# Altium PCB pcb.PcbDoc
Units mm, origin at the board's own origin, x right, y up, seen from the top; angles counter-clockwise.
Board outline 97 x 38.3 mm, 4 copper layers (Top Layer, Layer 1, Layer 2, Bottom Layer), stack 1.283 mm thick; 120 components, 63 nets, 372 pads, 0 vias.
Unrouted connection lines stored in the file: 242.
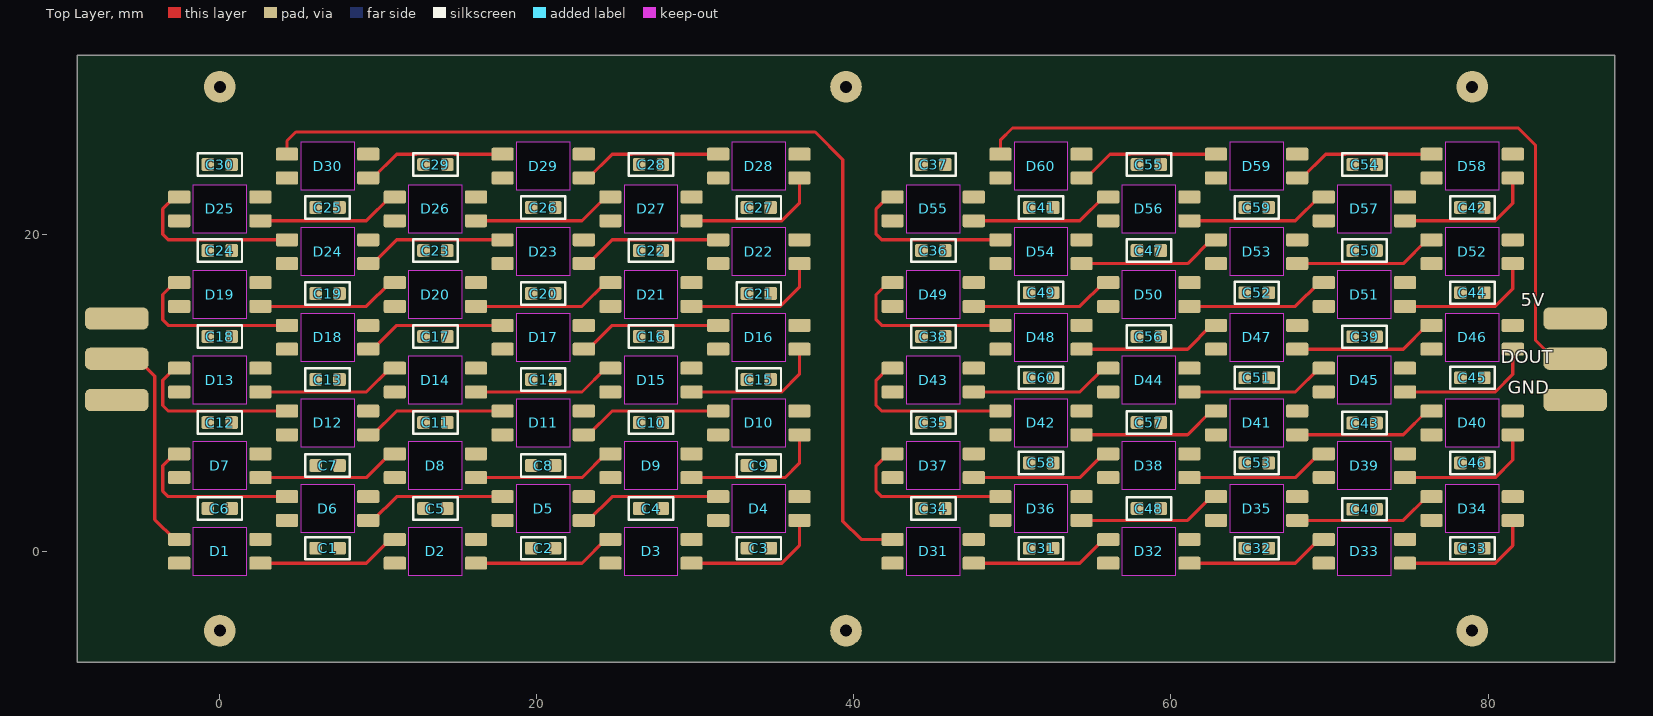
[diagram p0: Top Layer view]
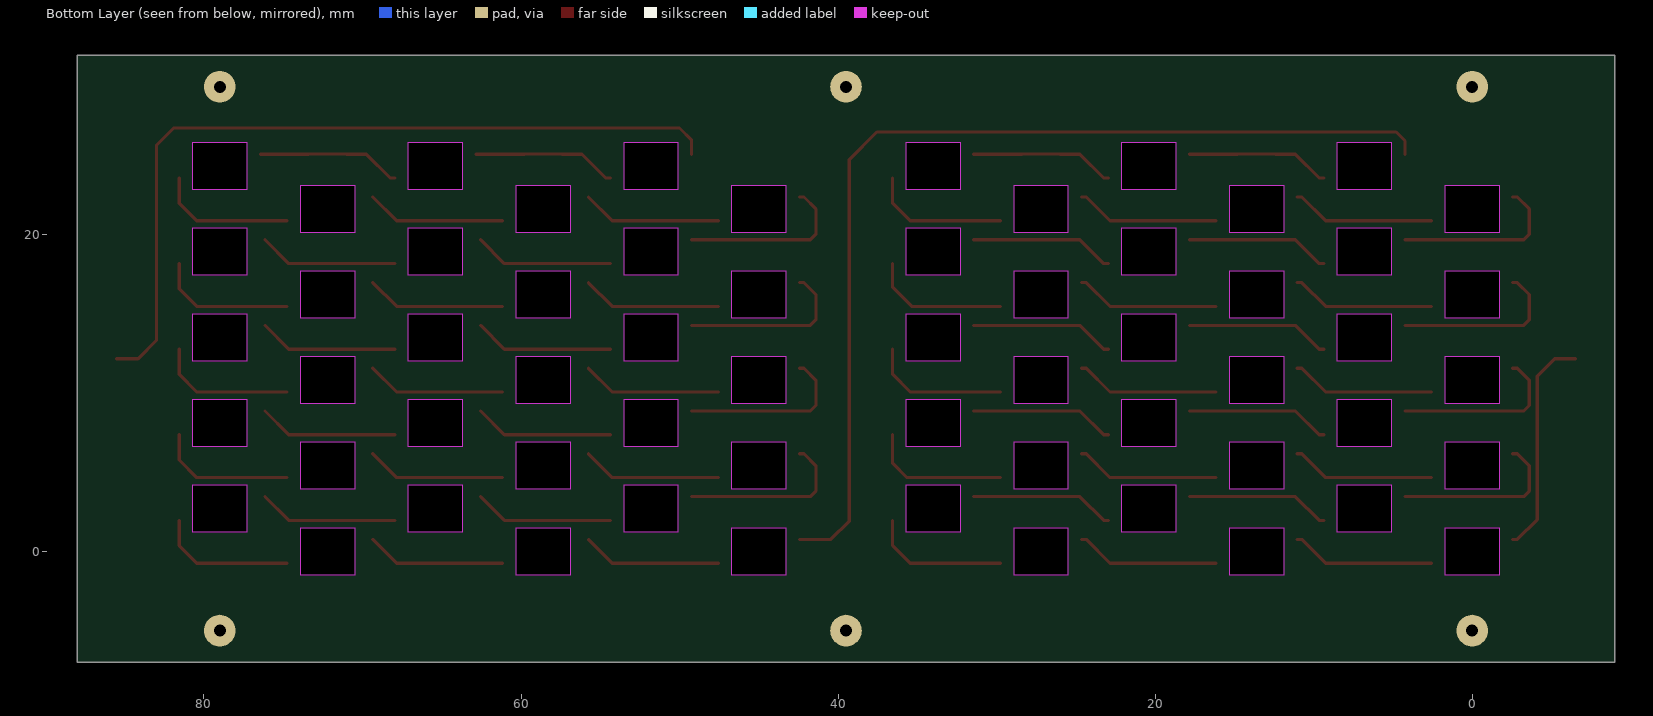
[diagram p1: Bottom Layer view, seen from below]
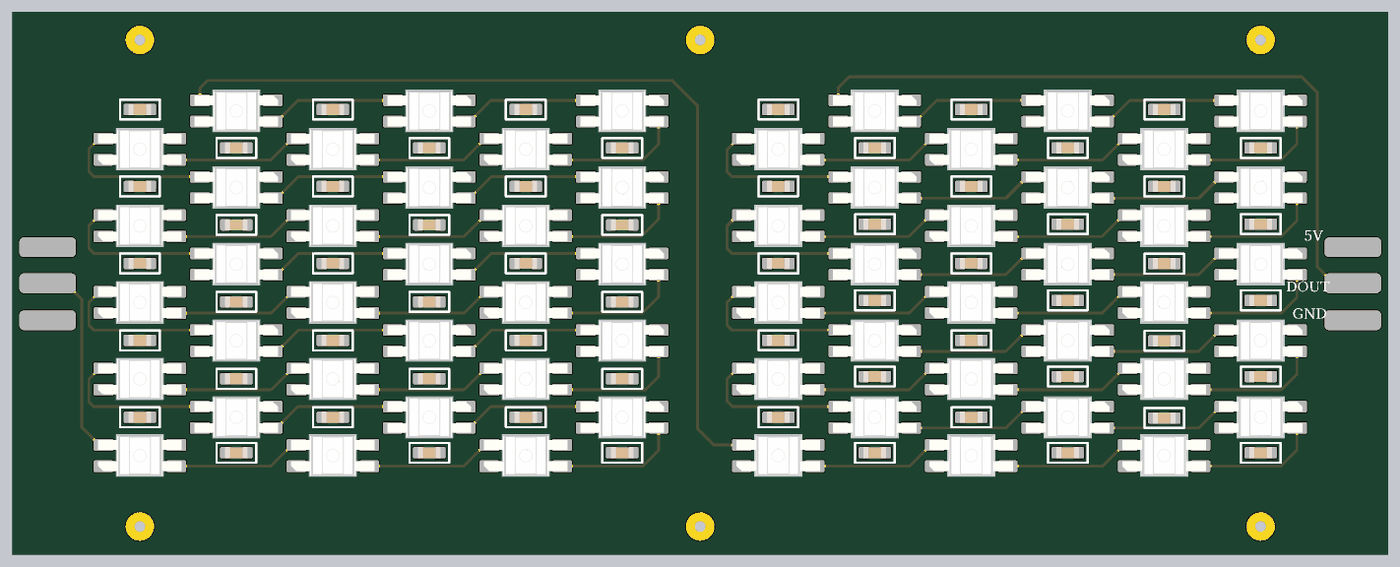
[diagram p2: 3D render of the assembled board from above, using the file's embedded part models]

## Layer stack, top to bottom
Top Solder: solder mask 0.0102, Solder Resist, Dk 3.5
Top Layer: signal copper 0.0356
Dielectric 2: prepreg 0.0711, PP-006, Dk 4.1
Layer 1: signal copper 0.035
Dielectric 1: dielectric 1, FR-4, Dk 4.8
Layer 2: signal copper 0.035
Dielectric 3: prepreg 0.0711, PP-006, Dk 4.1
Bottom Layer: signal copper 0.0356
Bottom Solder: solder mask 0.0102, Solder Resist, Dk 3.5

## Board outline
-9,-7 -9,31.3 88,31.3 88,-7

## Design rules (kind name [scope] priority, off if disabled: settings)
BoardOutlineClearance [All] p1: gap=0.198 ignorepadtopadclearanceinfootprint=FALSE except(0: Arc-SplitContinuation Track-SplitContinuation SMDPad-SplitContinuation THPad-SplitContinuation Via-SplitContinuation Fill-SplitContinuation Poly-SplitContinuation Region-SplitContinuation Text-SplitContinuation)
Clearance [All] p1: gap=0.152 ignorepadtopadclearanceinfootprint=TRUE except(0.305: Arc-Hole Track-Hole SMDPad-Hole THPad-Hole Via-Hole Fill-Hole Poly-Hole Region-Hole Text-Hole)
ComponentClearance [All] p1: gap=0.1 collisioncheckmode=3 verticalgap=0.1 showdistances=FALSE
DiffPairsRouting DiffPairsRouting_USB [InDifferentialPair('USB')] p1: maxlimit=0.5 minlimit=0.16 mostfreqgap=0.254 toplayer_prefgap=0.2 toplayer_minwidth=0.16 toplayer_maxwidth=5 toplayer_prefwidth=0.265 midlayer1_mingap=0.254 midlayer1_maxgap=0.254 midlayer1_minwidth=0.381 midlayer1_maxwidth=0.381 midlayer1_prefwidth=0.381 midlayer2_mingap=0.254 midlayer2_maxgap=0.254 midlayer2_minwidth=0.381 midlayer2_maxwidth=0.381 midlayer2_prefwidth=0.381 bottomlayer_prefgap=0.2 bottomlayer_minwidth=0.16 bottomlayer_maxwidth=5 bottomlayer_prefwidth=0.265 maxuncoupledlength=12.7
DiffPairsRouting DiffPairsRouting_ETH [InDifferentialPair('ETH_RX') or InDifferentialPair('ETH_TX')] p2: maxlimit=0.5 minlimit=0.16 mostfreqgap=0.254 toplayer_prefgap=0.194 toplayer_minwidth=0.16 toplayer_maxwidth=5 toplayer_prefwidth=0.22 midlayer1_mingap=0.254 midlayer1_maxgap=0.254 midlayer1_minwidth=0.381 midlayer1_maxwidth=0.381 midlayer1_prefwidth=0.381 midlayer2_mingap=0.254 midlayer2_maxgap=0.254 midlayer2_minwidth=0.381 midlayer2_maxwidth=0.381 midlayer2_prefwidth=0.381 bottomlayer_prefgap=0.194 bottomlayer_minwidth=0.16 bottomlayer_maxwidth=5 bottomlayer_prefwidth=0.22 maxuncoupledlength=12.7
DiffPairsRouting [All] p3: maxlimit=0.5 minlimit=0.16 mostfreqgap=0.3 toplayer_minwidth=0.16 toplayer_maxwidth=5 toplayer_prefwidth=0.3 midlayer1_mingap=0.254 midlayer1_maxgap=0.254 midlayer1_prefgap=0.254 midlayer1_minwidth=0.381 midlayer1_maxwidth=0.381 midlayer1_prefwidth=0.381 midlayer2_mingap=0.254 midlayer2_maxgap=0.254 midlayer2_prefgap=0.254 midlayer2_minwidth=0.381 midlayer2_maxwidth=0.381 midlayer2_prefwidth=0.381 bottomlayer_minwidth=0.16 bottomlayer_maxwidth=5 bottomlayer_prefwidth=0.3 maxuncoupledlength=12.7
HoleSize [All] p1: absolutevalues=TRUE maxlimit=6.3 minlimit=0.025 maxpercent=80.000 minpercent=20.000
MatchedLengths MatchedLengths_1 [InNetClass('RX')] p1: tolerance=2 checknetsindiffpair=FALSE checkdiffpairvsdiffpair=TRUE checkxsignals=TRUE checkothers=TRUE
MatchedLengths [InNetClass('TX')] p2: tolerance=2 checknetsindiffpair=FALSE checkdiffpairvsdiffpair=TRUE checkxsignals=TRUE checkothers=TRUE
MinimumAnnularRing [All] p1: minimumring=0.102
MinimumSolderMaskSliver [All] p1: minsoldermaskwidth=0.1
PlaneClearance [All] p1: clearance=0.1
PlaneConnect [All] p1: planeconnectstyle=Relief reliefexpansion=0.15 reliefentries=4 reliefconductorwidth=0.152 reliefairgap=0.2
PolygonConnect [All] p1: connectstyle=Relief reliefconductorwidth=0.152 reliefentries=4 polygonreliefangle="90 Angle" airgapwidth=0.152
RoutingVias [All] p1: holewidth=0.3 width=0.6 viastyle="Through Hole" minholewidth=0.2 minwidth=0.45 maxholewidth=6.3 maxwidth=10
SilkToSilkClearance [All] p1: silktosilkclearance=0.152
SilkToSolderMaskClearance [IsPad] p1: minsilkscreentomaskgap=0.152 clearancetoexposedcopper=TRUE
SolderMaskExpansion [All] p1: expansion=0.076 istentingtop=FALSE
Width [All] p1: maxlimit=10 minlimit=0.1 preferedwidth=0.1
22 further rules are at their usual default settings.

## Components (designator, comment, footprint, x,y, rotation, side; value= is the part's Value field where it differs from the comment)
C1 "passive_5" "capacitor 0603" 6.8,0.2 r0 top value=100nF
C2 "passive_5" "capacitor 0603" 20.4,0.2 r180 top value=100nF
C3 "passive_5" "capacitor 0603" 34,0.2 r0 top value=100nF
C4 "passive_5" "capacitor 0603" 27.2,2.7 r0 top value=100nF
C5 "passive_5" "capacitor 0603" 13.6,2.7 r0 top value=100nF
C6 "passive_5" "capacitor 0603" 0,2.7 r0 top value=100nF
C7 "passive_5" "capacitor 0603" 6.8,5.411 r0 top value=100nF
C8 "passive_5" "capacitor 0603" 20.4,5.411 r0 top value=100nF
C9 "passive_5" "capacitor 0603" 34,5.411 r0 top value=100nF
C10 "passive_5" "capacitor 0603" 27.2,8.123 r180 top value=100nF
C11 "passive_5" "capacitor 0603" 13.6,8.123 r0 top value=100nF
C12 "passive_5" "capacitor 0603" 0,8.123 r180 top value=100nF
C13 "passive_5" "capacitor 0603" 6.8,10.836 r180 top value=100nF
C14 "passive_5" "capacitor 0603" 20.4,10.836 r180 top value=100nF
C15 "passive_5" "capacitor 0603" 34,10.836 r180 top value=100nF
C16 "passive_5" "capacitor 0603" 27.2,13.55 r180 top value=100nF
C17 "passive_5" "capacitor 0603" 13.6,13.55 r180 top value=100nF
C18 "passive_5" "capacitor 0603" 0,13.55 r180 top value=100nF
C19 "passive_5" "capacitor 0603" 6.8,16.262 r180 top value=100nF
C20 "passive_5" "capacitor 0603" 20.4,16.262 r180 top value=100nF
C21 "passive_5" "capacitor 0603" 34,16.262 r0 top value=100nF
C22 "passive_5" "capacitor 0603" 27.2,18.975 r180 top value=100nF
C23 "passive_5" "capacitor 0603" 13.6,18.975 r180 top value=100nF
C24 "passive_5" "capacitor 0603" 0,18.975 r180 top value=100nF
C25 "passive_5" "capacitor 0603" 6.8,21.687 r180 top value=100nF
C26 "passive_5" "capacitor 0603" 20.4,21.687 r180 top value=100nF
C27 "passive_5" "capacitor 0603" 34,21.687 r180 top value=100nF
C28 "passive_5" "capacitor 0603" 27.2,24.4 r180 top value=100nF
C29 "passive_5" "capacitor 0603" 13.6,24.4 r180 top value=100nF
C30 "passive_5" "capacitor 0603" 0,24.4 r180 top value=100nF
C31 "passive_5" "capacitor 0603" 51.81,0.2 r0 top value=100nF
C32 "passive_5" "capacitor 0603" 65.41,0.2 r180 top value=100nF
C33 "passive_5" "capacitor 0603" 79.01,0.2 r180 top value=100nF
C34 "passive_5" "capacitor 0603" 45.01,2.7 r180 top value=100nF
C35 "passive_5" "capacitor 0603" 45.01,8.125 r180 top value=100nF
C36 "passive_5" "capacitor 0603" 45.01,18.975 r180 top value=100nF
C37 "passive_5" "capacitor 0603" 45.01,24.4 r180 top value=100nF
C38 "passive_5" "capacitor 0603" 45.01,13.55 r180 top value=100nF
C39 "passive_5" "capacitor 0603" 72.21,13.533 r180 top value=100nF
C40 "passive_5" "capacitor 0603" 72.21,2.65 r180 top value=100nF
C41 "passive_5" "capacitor 0603" 51.81,21.687 r0 top value=100nF
C42 "passive_5" "capacitor 0603" 79.01,21.687 r180 top value=100nF
C43 "passive_5" "capacitor 0603" 72.21,8.092 r180 top value=100nF
C44 "passive_5" "capacitor 0603" 79.01,16.316 r180 top value=100nF
C45 "passive_5" "capacitor 0603" 79.01,10.944 r180 top value=100nF
C46 "passive_5" "capacitor 0603" 79.01,5.572 r180 top value=100nF
C47 "passive_5" "capacitor 0603" 58.61,18.975 r180 top value=100nF
C48 "passive_5" "capacitor 0603" 58.61,2.7 r180 top value=100nF
C49 "passive_5" "capacitor 0603" 51.81,16.316 r180 top value=100nF
C50 "passive_5" "capacitor 0603" 72.21,18.975 r180 top value=100nF
C51 "passive_5" "capacitor 0603" 65.41,10.944 r0 top value=100nF
C52 "passive_5" "capacitor 0603" 65.41,16.316 r180 top value=100nF
C53 "passive_5" "capacitor 0603" 65.41,5.572 r180 top value=100nF
C54 "passive_5" "capacitor 0603" 72.21,24.4 r180 top value=100nF
C55 "passive_5" "capacitor 0603" 58.61,24.4 r180 top value=100nF
C56 "passive_5" "capacitor 0603" 58.61,13.55 r180 top value=100nF
C57 "passive_5" "capacitor 0603" 58.61,8.125 r180 top value=100nF
C58 "passive_5" "capacitor 0603" 51.81,5.572 r180 top value=100nF
C59 "passive_5" "capacitor 0603" 65.41,21.687 r180 top value=100nF
C60 "passive_5" "capacitor 0603" 51.81,10.944 r180 top value=100nF
D1 "diode_8" SK6812-E 0,0 r0 top
D2 "diode_8" SK6812-E 13.6,0 r0 top
D3 "diode_8" SK6812-E 27.2,0 r0 top
D4 "diode_8" SK6812-E 34,2.7 r180 top
D5 "diode_8" SK6812-E 20.4,2.7 r180 top
D6 "diode_8" SK6812-E 6.8,2.7 r180 top
D7 "diode_8" SK6812-E 0,5.4 r0 top
D8 "diode_8" SK6812-E 13.6,5.4 r0 top
D9 "diode_8" SK6812-E 27.2,5.4 r0 top
D10 "diode_8" SK6812-E 34,8.1 r180 top
D11 "diode_8" SK6812-E 20.4,8.1 r180 top
D12 "diode_8" SK6812-E 6.8,8.1 r180 top
D13 "diode_8" SK6812-E 0,10.8 r0 top
D14 "diode_8" SK6812-E 13.6,10.8 r0 top
D15 "diode_8" SK6812-E 27.2,10.8 r0 top
D16 "diode_8" SK6812-E 34,13.5 r180 top
D17 "diode_8" SK6812-E 20.4,13.5 r180 top
D18 "diode_8" SK6812-E 6.8,13.5 r180 top
D19 "diode_8" SK6812-E 0,16.2 r0 top
D20 "diode_8" SK6812-E 13.6,16.2 r0 top
D21 "diode_8" SK6812-E 27.2,16.2 r0 top
D22 "diode_8" SK6812-E 34,18.9 r180 top
D23 "diode_8" SK6812-E 20.4,18.9 r180 top
D24 "diode_8" SK6812-E 6.8,18.9 r180 top
D25 "diode_8" SK6812-E 0,21.6 r0 top
D26 "diode_8" SK6812-E 13.6,21.6 r0 top
D27 "diode_8" SK6812-E 27.2,21.6 r0 top
D28 "diode_8" SK6812-E 34,24.3 r180 top
D29 "diode_8" SK6812-E 20.4,24.3 r180 top
D30 "diode_8" SK6812-E 6.8,24.3 r180 top
D31 "diode_8" SK6812-E 45,0 r0 top
D32 "diode_8" SK6812-E 58.6,0 r0 top
D33 "diode_8" SK6812-E 72.2,0 r0 top
D34 "diode_8" SK6812-E 79,2.7 r180 top
D35 "diode_8" SK6812-E 65.4,2.7 r180 top
D36 "diode_8" SK6812-E 51.8,2.7 r180 top
D37 "diode_8" SK6812-E 45,5.4 r0 top
D38 "diode_8" SK6812-E 58.6,5.4 r0 top
D39 "diode_8" SK6812-E 72.2,5.4 r0 top
D40 "diode_8" SK6812-E 79,8.1 r180 top
D41 "diode_8" SK6812-E 65.4,8.1 r180 top
D42 "diode_8" SK6812-E 51.8,8.1 r180 top
D43 "diode_8" SK6812-E 45,10.8 r0 top
D44 "diode_8" SK6812-E 58.6,10.8 r0 top
D45 "diode_8" SK6812-E 72.2,10.8 r0 top
D46 "diode_8" SK6812-E 79,13.5 r180 top
D47 "diode_8" SK6812-E 65.4,13.5 r180 top
D48 "diode_8" SK6812-E 51.8,13.5 r180 top
D49 "diode_8" SK6812-E 45,16.2 r0 top
D50 "diode_8" SK6812-E 58.6,16.2 r0 top
D51 "diode_8" SK6812-E 72.2,16.2 r0 top
D52 "diode_8" SK6812-E 79,18.9 r180 top
D53 "diode_8" SK6812-E 65.4,18.9 r180 top
D54 "diode_8" SK6812-E 51.8,18.9 r180 top
D55 "diode_8" SK6812-E 45,21.6 r0 top
D56 "diode_8" SK6812-E 58.6,21.6 r0 top
D57 "diode_8" SK6812-E 72.2,21.6 r0 top
D58 "diode_8" SK6812-E 79,24.3 r180 top
D59 "diode_8" SK6812-E 65.4,24.3 r180 top
D60 "diode_8" SK6812-E 51.8,24.3 r180 top

## Footprints (in the part's own frame and the unit in brackets; to place one, negate y for a bottom-side part, rotate by r counter-clockwise, add the part's x,y. Pads: shape width x height; smd on the part's side, far side on the other; paste and mask are expansions set on the pad)
"capacitor 0603" [mm]
  rrect25% 0.8x0.8 smd: 1(-0.75,0) 2(0.75,0)
  silkscreen extent -1.4,-0.7 1.4,0.7, body extent -0.8,-0.4 0.8,0.4, height 0.8
SK6812-E [mm]
  rrect25% 1.4x0.82 smd: 1(2.56,0.75) 2(2.56,-0.75) 3(-2.56,-0.75) 4(-2.56,0.75)
  Keep-Out Layer board cut-out: -1.7,-1.5 1.7,-1.5 1.7,1.5 -1.7,1.5
  body extent -2.94,-1.4 2.94,1.4, height 0.94

## Part data
C1 C2 C3 C4 C5 C6 C7 C8 C9 C10 C11 C12 C13 C14 C15 C16 C17 C18 C19 C20 C21 C22 C23 C24 C25 C26 C27 C28 C29 C30 C31 C32 C33 C34 C35 C36 C37 C38 C39 C40 C41 C42 C43 C44 C45 C46 C47 C48 C49 C50 C51 C52 C53 C54 C55 C56 C57 C58 C59 C60: "Capacitor 0603"
D1 D2 D3 D4 D5 D6 D7 D8 D9 D10 D11 D12 D13 D14 D15 D16 D17 D18 D19 D20 D21 D22 D23 D24 D25 D26 D27 D28 D29 D30 D31 D32 D33 D34 D35 D36 D37 D38 D39 D40 D41 D42 D43 D44 D45 D46 D47 D48 D49 D50 D51 D52 D53 D54 D55 D56 D57 D58 D59 D60: "SK6812-E"

## Free pads (board coordinates)
  rrect50% 4x1.4 smd: 1(-6.5,14.69) 2(-6.5,12.15) 3(-6.5,9.54) 4(85.5,14.69) 5(85.5,12.15) 6(85.5,9.54)
  round 2 hole 0.762: 9(0,-5) 9(0,29.3) 9(39.5,-5) 9(39.5,29.3) 9(79,-5) 9(79,29.3)

## Nets (pads, with @x,y where several pads share a name; then routed paths per layer and width w, separated by ;. In a path a pad name is that pad's centre, name@x,y a point inside that pad or via, vN(x,y) a via of type N, cw(c..) or ccw(c..) an arc to the next point about the centre after c; other vN are vias at no path point)
5V: C1.2 C2.2 C3.2 C4.2 C5.2 C6.2 C7.2 C8.2 C9.2 C10.2 C11.2 C12.2 C13.2 C14.2 C15.2 C16.2 C17.2 C18.2 C19.2 C20.2 C21.2 C22.2 C23.2 C24.2 C25.2 C26.2 C27.2 C28.2 C29.2 C30.2 C31.2 C32.2 C33.2 C34.2 C35.2 C36.2 C37.2 C38.2 C39.2 C40.2 C41.2 C42.2 C43.2 C44.2 C45.2 C46.2 C47.2 C48.2 C49.2 C50.2 C51.2 C52.2 C53.2 C54.2 C55.2 C56.2 C57.2 C58.2 C59.2 C60.2 D1.1 D2.1 D3.1 D4.1 D5.1 D6.1 D7.1 D8.1 D9.1 D10.1 D11.1 D12.1 D13.1 D14.1 D15.1 D16.1 D17.1 D18.1 D19.1 D20.1 D21.1 D22.1 D23.1 D24.1 D25.1 D26.1 D27.1 D28.1 D29.1 D30.1 D31.1 D32.1 D33.1 D34.1 D35.1 D36.1 D37.1 D38.1 D39.1 D40.1 D41.1 D42.1 D43.1 D44.1 D45.1 D46.1 D47.1 D48.1 D49.1 D50.1 D51.1 D52.1 D53.1 D54.1 D55.1 D56.1 D57.1 D58.1 D59.1 D60.1 pad.1 pad.4
DIN: D1.4 pad.2 | length 14
  Top Layer w0.2: pad.2 -5.2,12.15 -4.1,11.05 -4.1,2.001 -2.849,0.75 D1.4
DOUT: D60.2 pad.5 | length 50.7
  Top Layer w0.2: D60.2 49.24,25.94 50,26.7 81.9,26.7 83,25.6 83,13.3 84.15,12.15 pad.5
GND: C1.1 C2.1 C3.1 C4.1 C5.1 C6.1 C7.1 C8.1 C9.1 C10.1 C11.1 C12.1 C13.1 C14.1 C15.1 C16.1 C17.1 C18.1 C19.1 C20.1 C21.1 C22.1 C23.1 C24.1 C25.1 C26.1 C27.1 C28.1 C29.1 C30.1 C31.1 C32.1 C33.1 C34.1 C35.1 C36.1 C37.1 C38.1 C39.1 C40.1 C41.1 C42.1 C43.1 C44.1 C45.1 C46.1 C47.1 C48.1 C49.1 C50.1 C51.1 C52.1 C53.1 C54.1 C55.1 C56.1 C57.1 C58.1 C59.1 C60.1 D1.3 D2.3 D3.3 D4.3 D5.3 D6.3 D7.3 D8.3 D9.3 D10.3 D11.3 D12.3 D13.3 D14.3 D15.3 D16.3 D17.3 D18.3 D19.3 D20.3 D21.3 D22.3 D23.3 D24.3 D25.3 D26.3 D27.3 D28.3 D29.3 D30.3 D31.3 D32.3 D33.3 D34.3 D35.3 D36.3 D37.3 D38.3 D39.3 D40.3 D41.3 D42.3 D43.3 D44.3 D45.3 D46.3 D47.3 D48.3 D49.3 D50.3 D51.3 D52.3 D53.3 D54.3 D55.3 D56.3 D57.3 D58.3 D59.3 D60.3 pad.3 pad.6
NetD1_2: D1.2 D2.4 | length 9.1
  Top Layer w0.2: D1.2 9.247,-0.75 10.749,0.751 D2.4
NetD2_2: D2.2 D3.4 | length 9.1
  Top Layer w0.2: D2.2 22.847,-0.75 24.349,0.751 D3.4@24.639,0.751
NetD3_2: D3.2 D4.4 | length 8.8
  Top Layer w0.2: D3.2 35.45,-0.75 36.56,0.36 D4.4
NetD4_2: D4.2 D5.4 | length 9.1
  Top Layer w0.2: D5.4@22.961,1.949 23.251,1.949 24.753,3.45 D4.2
NetD5_2: D5.2 D6.4 | length 9.1
  Top Layer w0.2: D6.4@9.361,1.949 9.651,1.949 11.153,3.45 D5.2
NetD6_2: D6.2 D7.4 | length 10.9
  Top Layer w0.2: D7.4 -2.85,6.15 -3.6,5.4 -3.6,3.8 -3.25,3.45 D6.2
NetD7_2: D7.2 D8.4 | length 9.1
  Top Layer w0.2: D7.2 9.247,4.65 10.749,6.151 D8.4
NetD8_2: D8.2 D9.4 | length 9.1
  Top Layer w0.2: D8.2 22.847,4.65 24.349,6.151 D9.4@24.639,6.151
NetD9_2: D9.2 D10.4 | length 9
  Top Layer w0.2: D9.2 35.65,4.65 36.56,5.56 D10.4
NetD10_2: D10.2 D11.4 | length 9.1
  Top Layer w0.2: D11.4@22.961,7.349 23.251,7.349 24.753,8.85 D10.2
NetD11_2: D11.2 D12.4 | length 9.1
  Top Layer w0.2: D12.4@9.361,7.349 9.651,7.349 11.153,8.85 D11.2
NetD12_2: D12.2 D13.4 | length 10.9
  Top Layer w0.2: D13.4 -2.85,11.55 -3.6,10.8 -3.6,9.2 -3.25,8.85 D12.2
NetD13_2: D13.2 D14.4 | length 9.1
  Top Layer w0.2: D13.2 9.247,10.05 10.749,11.551 D14.4
NetD14_2: D14.2 D15.4 | length 9.1
  Top Layer w0.2: D14.2 22.847,10.05 24.349,11.551 D15.4@24.639,11.551
NetD15_2: D15.2 D16.4 | length 8.8
  Top Layer w0.2: D15.2 35.45,10.05 36.56,11.16 D16.4
NetD16_2: D16.2 D17.4 | length 9.1
  Top Layer w0.2: D17.4@22.961,12.749 23.251,12.749 24.753,14.25 D16.2
NetD17_2: D17.2 D18.4 | length 9.1
  Top Layer w0.2: D18.4@9.361,12.749 9.651,12.749 11.153,14.25 D17.2
NetD18_2: D18.2 D19.4 | length 10.9
  Top Layer w0.2: D19.4 -2.85,16.95 -3.6,16.2 -3.6,14.6 -3.25,14.25 D18.2
NetD19_2: D19.2 D20.4 | length 9.1
  Top Layer w0.2: D19.2 9.247,15.45 10.749,16.951 D20.4
NetD20_2: D20.2 D21.4 | length 9.1
  Top Layer w0.2: D20.2 22.847,15.45 24.349,16.951 D21.4@24.639,16.951
NetD21_2: D21.2 D22.4 | length 8.8
  Top Layer w0.2: D21.2 35.35,15.45 36.56,16.66 D22.4
NetD22_2: D22.2 D23.4 | length 9.1
  Top Layer w0.2: D23.4@22.961,18.149 23.251,18.149 24.753,19.65 D22.2
NetD23_2: D23.2 D24.4 | length 9.1
  Top Layer w0.2: D24.4@9.361,18.149 9.651,18.149 11.153,19.65 D23.2
NetD24_2: D24.2 D25.4 | length 10.9
  Top Layer w0.2: D25.4 -2.85,22.35 -3.6,21.6 -3.6,20 -3.25,19.65 D24.2
NetD25_2: D25.2 D26.4 | length 9.1
  Top Layer w0.2: D25.2 9.247,20.85 10.749,22.351 D26.4
NetD26_2: D26.2 D27.4 | length 9.1
  Top Layer w0.2: D26.2 22.847,20.85 24.349,22.351 D27.4@24.639,22.351
NetD27_2: D27.2 D28.4 | length 8.8
  Top Layer w0.2: D27.2 35.45,20.85 36.56,21.96 D28.4
NetD28_2: D28.2 D29.4 | length 9.1
  Top Layer w0.2: D29.4@22.961,23.549 23.251,23.549 24.753,25.05 26.002,25.05 26.004,25.052 28.396,25.052 28.398,25.05 D28.2
NetD29_2: D29.2 D30.4 | length 9.1
  Top Layer w0.2: D30.4 9.65,23.55 11.151,25.051 12.403,25.051 12.404,25.052 14.796,25.052 14.797,25.051 17.839,25.051 D29.2
NetD30_2: D30.2 D31.4 | length 63.3
  Top Layer w0.2: D30.2 4.24,25.89 4.8,26.45 37.55,26.45 39.3,24.7 39.3,1.9 40.45,0.75 D31.4
NetD31_2: D31.2 D32.4 | length 8.8
  Top Layer w0.2: D31.2 54.247,-0.75 D32.4@55.749,0.751
NetD32_2: D32.2 D33.4 | length 8.8
  Top Layer w0.2: D32.2 67.847,-0.75 D33.4@69.349,0.751
NetD33_2: D33.2 D34.4 | length 8.8
  Top Layer w0.2: D33.2 80.45,-0.75 81.56,0.36 D34.4
NetD34_2: D34.2 D35.4 | length 8.8
  Top Layer w0.2: D35.4 74.647,1.95 D34.2@76.149,3.451
NetD35_2: D35.2 D36.4 | length 8.8
  Top Layer w0.2: D36.4 61.047,1.95 D35.2@62.549,3.451
NetD36_2: D36.2 D37.4 | length 10.9
  Top Layer w0.2: D37.4 42.15,6.15 41.4,5.4 41.4,3.8 41.75,3.45 D36.2
NetD37_2: D37.2 D38.4 | length 8.8
  Top Layer w0.2: D37.2 54.247,4.65 D38.4@55.749,6.151
NetD38_2: D38.2 D39.4 | length 8.8
  Top Layer w0.2: D38.2 67.847,4.65 D39.4@69.349,6.151
NetD39_2: D39.2 D40.4 | length 8.8
  Top Layer w0.2: D39.2 80.45,4.65 81.56,5.76 D40.4
NetD40_2: D40.2 D41.4 | length 8.8
  Top Layer w0.2: D41.4 74.647,7.35 D40.2@76.149,8.851
NetD41_2: D41.2 D42.4 | length 8.8
  Top Layer w0.2: D42.4 61.047,7.35 D41.2@62.549,8.851
NetD42_2: D42.2 D43.4 | length 10.9
  Top Layer w0.2: D43.4 42.15,11.55 41.4,10.8 41.4,9.2 41.75,8.85 D42.2
NetD43_2: D43.2 D44.4 | length 8.8
  Top Layer w0.2: D43.2 54.247,10.05 D44.4@55.749,11.551
NetD44_2: D44.2 D45.4 | length 8.8
  Top Layer w0.2: D44.2 67.847,10.05 D45.4@69.349,11.551
NetD45_2: D45.2 D46.4 | length 8.8
  Top Layer w0.2: D45.2 80.45,10.05 81.56,11.16 D46.4
NetD46_2: D46.2 D47.4 | length 8.8
  Top Layer w0.2: D47.4 74.647,12.75 D46.2@76.149,14.251
NetD47_2: D47.2 D48.4 | length 8.8
  Top Layer w0.2: D48.4 61.047,12.75 D47.2@62.549,14.251
NetD48_2: D48.2 D49.4 | length 10.9
  Top Layer w0.2: D49.4 42.15,16.95 41.4,16.2 41.4,14.6 41.75,14.25 D48.2
NetD49_2: D49.2 D50.4 | length 8.8
  Top Layer w0.2: D49.2 54.247,15.45 D50.4@55.749,16.951
NetD50_2: D50.2 D51.4 | length 8.8
  Top Layer w0.2: D50.2 67.847,15.45 D51.4@69.349,16.951
NetD51_2: D51.2 D52.4 | length 8.8
  Top Layer w0.2: D51.2 80.45,15.45 81.56,16.56 D52.4
NetD52_2: D52.2 D53.4 | length 8.8
  Top Layer w0.2: D53.4 74.647,18.15 D52.2@76.149,19.651
NetD53_2: D53.2 D54.4 | length 8.8
  Top Layer w0.2: D54.4 61.047,18.15 D53.2@62.549,19.651
NetD54_2: D54.2 D55.4 | length 10.9
  Top Layer w0.2: D55.4 42.15,22.35 41.4,21.6 41.4,20 41.75,19.65 D54.2
NetD55_2: D55.2 D56.4 | length 8.8
  Top Layer w0.2: D55.2 54.247,20.85 D56.4@55.749,22.351
NetD56_2: D56.2 D57.4 | length 8.8
  Top Layer w0.2: D56.2 67.847,20.85 D57.4@69.349,22.351
NetD57_2: D57.2 D58.4 | length 8.8
  Top Layer w0.2: D57.2 80.45,20.85 81.56,21.96 D58.4
NetD58_2: D58.2 D59.4 | length 9.1
  Top Layer w0.2: D59.4 68.251,23.549 69.753,25.05 71.002,25.05 71.004,25.052 73.396,25.052 73.398,25.05 D58.2
NetD59_2: D59.2 D60.4 | length 9.1
  Top Layer w0.2: D60.4 54.651,23.549 56.153,25.05 57.402,25.05 57.404,25.052 59.796,25.052 59.798,25.05 D59.2

## Silkscreen, mask and mechanical layers (free items; w line width, h text height)
Top Overlay:
  text "5V" at 82.05,15.164 h1.4
  text "DOUT" at 80.8,11.564 h1.4
  text "GND" at 81.25,9.664 h1.4
Mechanical 1:
  lines w0.1: -2.56,-0.75 2.56,0.75 ; -2.56,0.75 2.56,-0.75 ; 0,0 0,-5 -9,-5 -9,-7 ; 4.24,23.55 9.36,25.05 ; 4.24,25.05 9.36,23.55 ; 9.7,25.7 9.7,26 ; 79,29.3 88,29.3 88,31.3 ; -9,-7 88,-7 88,31.3 ; -9,-7 -9,31.3 88,31.3